# EAGLE board prot_PBC (EAGLE 6.0)
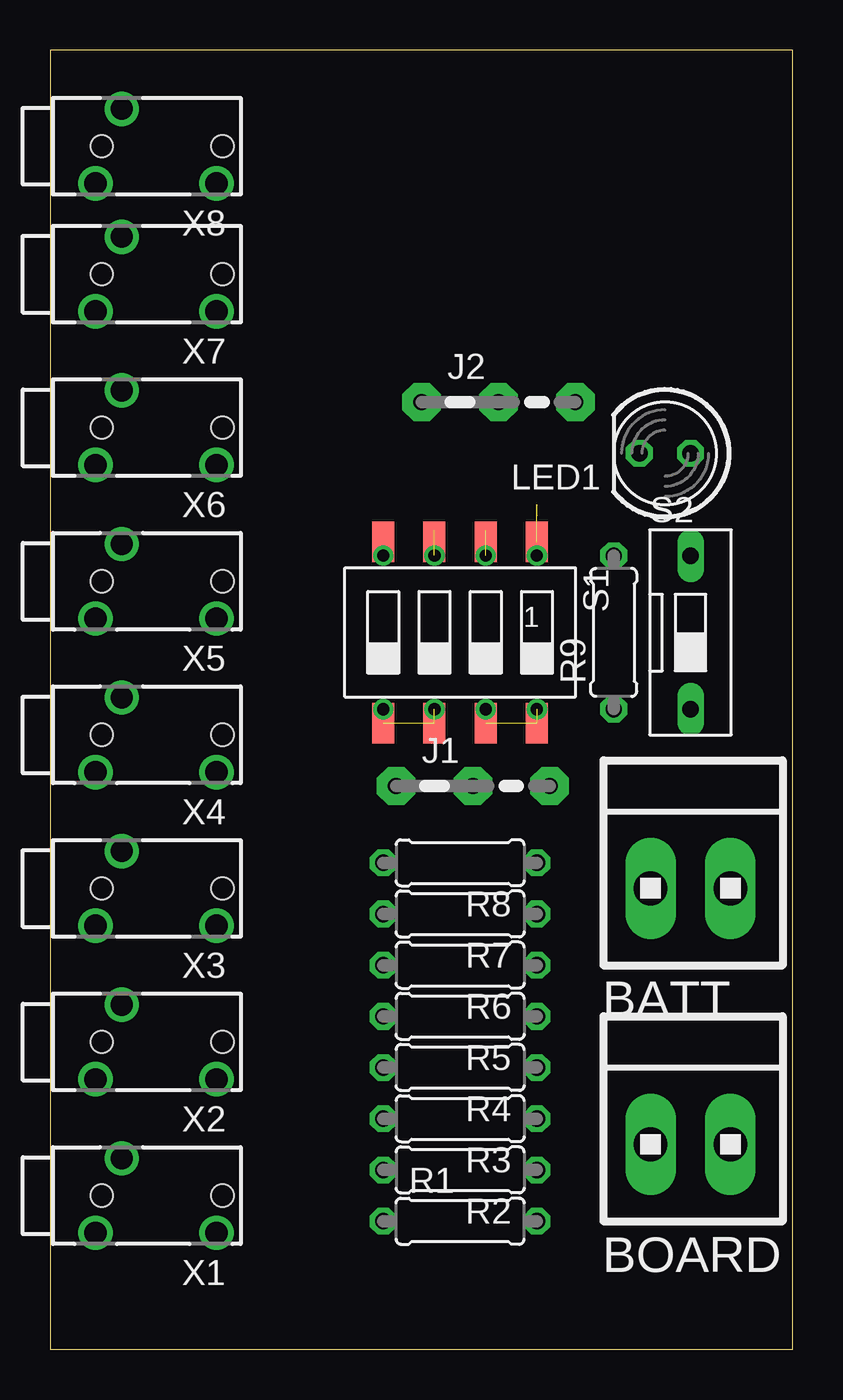
[diagram p0: board, top side]
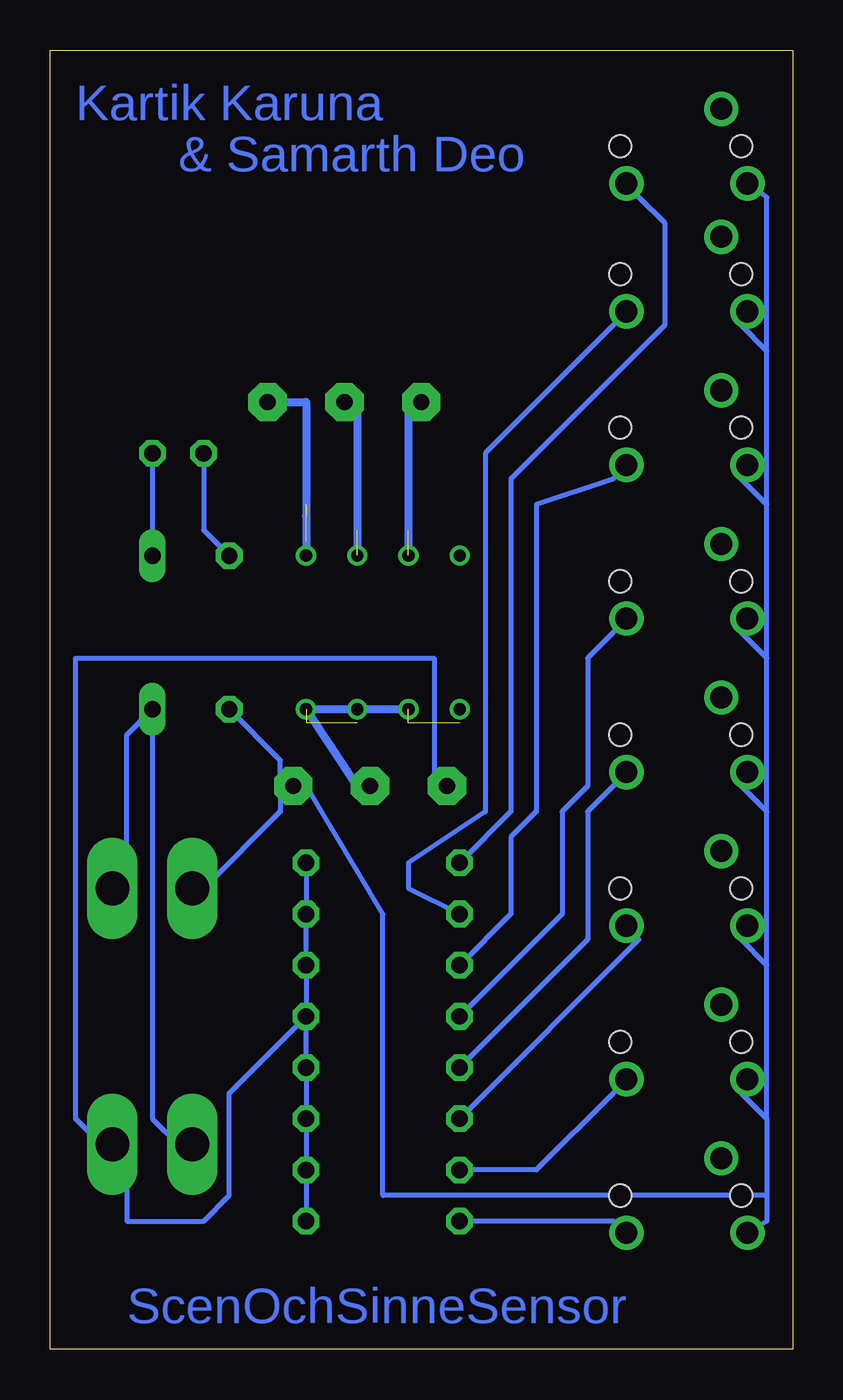
[diagram p1: board, bottom side, seen from below]

Size 36.81 x 64.44 mm. Coordinates in mm from the lower left corner, seen from the top.
Outline: 0,0 36.81,0 36.81,64.44 0,64.44 0,0
Copper layers (1*16): Top 0.035mm / dielectric 1.5mm / Bottom 0.035mm
Design rules: minimum track width 10mil, minimum drill 24mil, track to track 8mil, track to pad 8mil, pad to pad 8mil, via to via 8mil, smd to smd 8mil, copper to edge 40mil, drill to drill 8mil, minimum pad ring 10mil, minimum via ring 8mil, stop-mask expansion 4mil, vias tented up to drill 0mil, thermal gap 10mil

## Footprints (pad centres in the part's own frame; a part is rotated, then mirrored left to right if it is on the bottom)
1X2MTA = drill 1.676 long: 1 1.981,0; 2 -1.981,0
04C = drill 0.813 pad 1.905 octagon: 1 -1.905,0; 2 1.905,0; 3 5.715,0
LED5MM = drill 0.813 octagon: A -1.27,0; K 1.27,0
0207/7 = drill 0.813 octagon: 1 -3.81,0; 2 3.81,0
SMS-004 = smd 1.092 x 2.007: 1 -3.81,-4.496; 2 -1.27,-4.496; 3 1.27,-4.496; 4 3.81,-4.496; 5 3.81,4.496; 6 1.27,4.496; 7 -1.27,4.496; 8 -3.81,4.496
DS-01 = drill 0.813 long: 1 0,-3.81; 2 0,3.81
1501_03 = drill 1.1 pad 1.7: 1 -1.85,0.3; 2 1.85,-1; 3 -1.85,-5.7 | hole 1.1: 0,0; 0,-6

## Placement (x,y rotation side)
BATT  [1X2MTA]  31.75,22.86 0 top
BOARD  [1X2MTA]  31.75,10.16 0 top
J1  [04C]  19.05,27.94 0 top
J2  [04C]  20.32,46.99 0 top
LED1  [LED5MM]  30.48,44.45 180 top
R1  22K  [0207/7]  20.32,6.35 0 top
R2  22K  [0207/7]  20.32,8.89 180 top
R3  22K  [0207/7]  20.32,11.43 180 top
R4  22K  [0207/7]  20.32,13.97 180 top
R5  22K  [0207/7]  20.32,16.51 180 top
R6  22K  [0207/7]  20.32,19.05 180 top
R7  22K  [0207/7]  20.32,21.59 180 top
R8  22K  [0207/7]  20.32,24.13 180 top
R9  1K  [0207/7]  27.94,35.56 90 top
S1  SWS004  [SMS-004]  20.32,35.56 180 top
S2  [DS-01]  31.75,35.56 0 top
X1  [1501_03]  2.54,7.62 90 top
X2  [1501_03]  2.54,15.24 90 top
X3  [1501_03]  2.54,22.86 90 top
X4  [1501_03]  2.54,30.48 90 top
X5  [1501_03]  2.54,38.1 90 top
X6  [1501_03]  2.54,45.72 90 top
X7  [1501_03]  2.54,53.34 90 top
X8  [1501_03]  2.54,59.69 90 top

## Library data of the parts
BATT BOARD = con-amp
J1 J2 = jumper
LED1 = led
R1-R9 = resistor
S1 = smd-special
S2 = switch-dil; OC_FARNELL: unknown; OC_NEWARK: unknown
X1-X8 = con-lumberg; OC_FARNELL: 1200127; OC_NEWARK: unknown

## Nets
ADC_0: R1.1 X1.3
ADC_1: R2.2 X2.3
ADC_2: R3.2 X3.3
ADC_3: R4.2 X4.3
ADC_4: R5.2 X5.3
ADC_6: R6.2 X6.3
ADC_7: R7.2 X7.3
ADC_8: R8.2 X8.3
ADD_0: J2.3 S1.1
ADD_1: J2.2 S1.2
ADD_2: J2.1 S1.3
GND: BATT.2 J1.3 R9.1 X1.1 X2.1 X3.1 X4.1 X5.1 X6.1 X7.1 X8.1
N$1: LED1.K R9.2
N$2: LED1.A S2.2
VCC: BOARD.1 J1.1 R1.2 R2.1 R3.1 R4.1 R5.1 R6.1 R7.1 R8.1
VCC1: BATT.1 BOARD.2 S2.1
VCC/GND: J1.2 S1.5 S1.6 S1.7 S1.8

## Tracks (layer width: path | path; a pad name or v marks a point on that pad's centre or on a via)
ADC_0
  Bottom 0.254: R1.1 8.89,6.35 X1.3
ADC_1
  Bottom 0.254: R2.2 12.7,8.89 8.89,12.7 X2.3
ADC_2
  Bottom 0.254: R3.2 7.62,20.32 X3.3
ADC_3
  Bottom 0.254: R4.2 10.16,20.32 10.16,26.67 8.89,27.94 X4.3
ADC_4
  Bottom 0.254: R5.2 11.43,21.59 11.43,26.67 10.16,27.94 10.16,34.29 8.89,35.56 X5.3
ADC_6
  Bottom 0.254: R6.2 13.97,21.59 13.97,25.4 12.7,26.67 12.7,41.91 8.89,43.18 X6.3
ADC_7
  Bottom 0.254: R7.2 19.05,22.86 19.05,24.13 15.24,26.67 15.24,44.45 8.89,50.8 X7.3
ADC_8
  Bottom 0.254: R8.2 13.97,26.67 13.97,43.18 6.35,50.8 6.35,55.88 7.62,57.15 X8.3
ADD_0  (via drill 0.6)  (3 unrouted)
  Bottom 0.406: J2.3 24.13,46.99 24.13,41.33 v24.13,39.37
ADD_1  (via drill 0.6)  (2 unrouted)
  Bottom 0.406: J2.2 21.59,46.99 21.59,40.64 v21.59,39.37
ADD_2  (via drill 0.6)  (2 unrouted)
  Bottom 0.406: J2.1 19.05,46.99 19.05,40.64 v19.05,39.37
GND
  Bottom 0.254: R9.1 25.4,29.21 25.4,27.94 | 25.4,27.94 25.4,26.67 29.21,22.86 BATT.2 | 25.4,27.94 J1.3 24.13,27.94 20.32,21.59 20.32,7.62 1.27,7.62 | 1.27,7.62 1.27,6.35 X1.1 | 1.27,11.43 1.27,7.62 | 1.27,11.43 2.54,12.7 X2.1 | 1.27,19.05 2.54,20.32 X3.1 | 1.27,11.43 1.27,19.05 | 1.27,26.67 2.54,27.94 X4.1 | 1.27,19.05 1.27,26.67 | 1.27,34.29 2.54,35.56 X5.1 | 1.27,26.67 1.27,34.29 | 1.27,41.91 2.54,43.18 X6.1 | 1.27,34.29 1.27,41.91 | 1.27,49.53 2.54,50.8 X7.1 | 1.27,41.91 1.27,49.53 | 1.27,49.53 1.27,57.15 X8.1
N$1
  Bottom 0.254: R9.2 29.21,40.64 LED1.K
N$2
  Bottom 0.254: LED1.A S2.2
N$3  (via drill 0.6)
  other vias: 16.51,31.75
N$4  (via drill 0.6)
  other vias: 19.05,31.75
N$5  (via drill 0.6)
  other vias: 21.59,31.75
N$6  (via drill 0.6)
  other vias: 24.13,31.75
N$10  (via drill 0.6)
  other vias: 16.51,39.37
VCC
  Bottom 0.254: R8.1 R7.1 R6.1 R5.1 | R1.2 R2.1 R3.1 R4.1 R5.1 | J1.1 17.78,27.94 17.78,34.29 35.56,34.29 35.56,11.43 34.29,10.16 BOARD.1 33.02,10.16 33.02,6.35 29.21,6.35 27.94,7.62 27.94,12.7 R5.1
VCC1
  Bottom 0.254: BATT.1 33.02,22.86 33.02,30.48 S2.1 31.75,11.43 30.48,10.16 BOARD.2
VCC/GND  (4 unrouted)
  Bottom 0.406: J1.2 21.59,27.94 24.13,31.75 19.05,31.75

## Text on the board
Bottom: Kartik Karuna | & Samarth Deo | ScenOchSinneSensor